# Altium PCB Jammer.PcbDoc
Units mil, origin at the board's own origin, x right, y up, seen from the top; angles counter-clockwise.
Board outline 2745 x 2485 mil, 2 copper layers (Top Layer, Bottom Layer); 20 components, 13 nets, 50 pads, 6 vias.
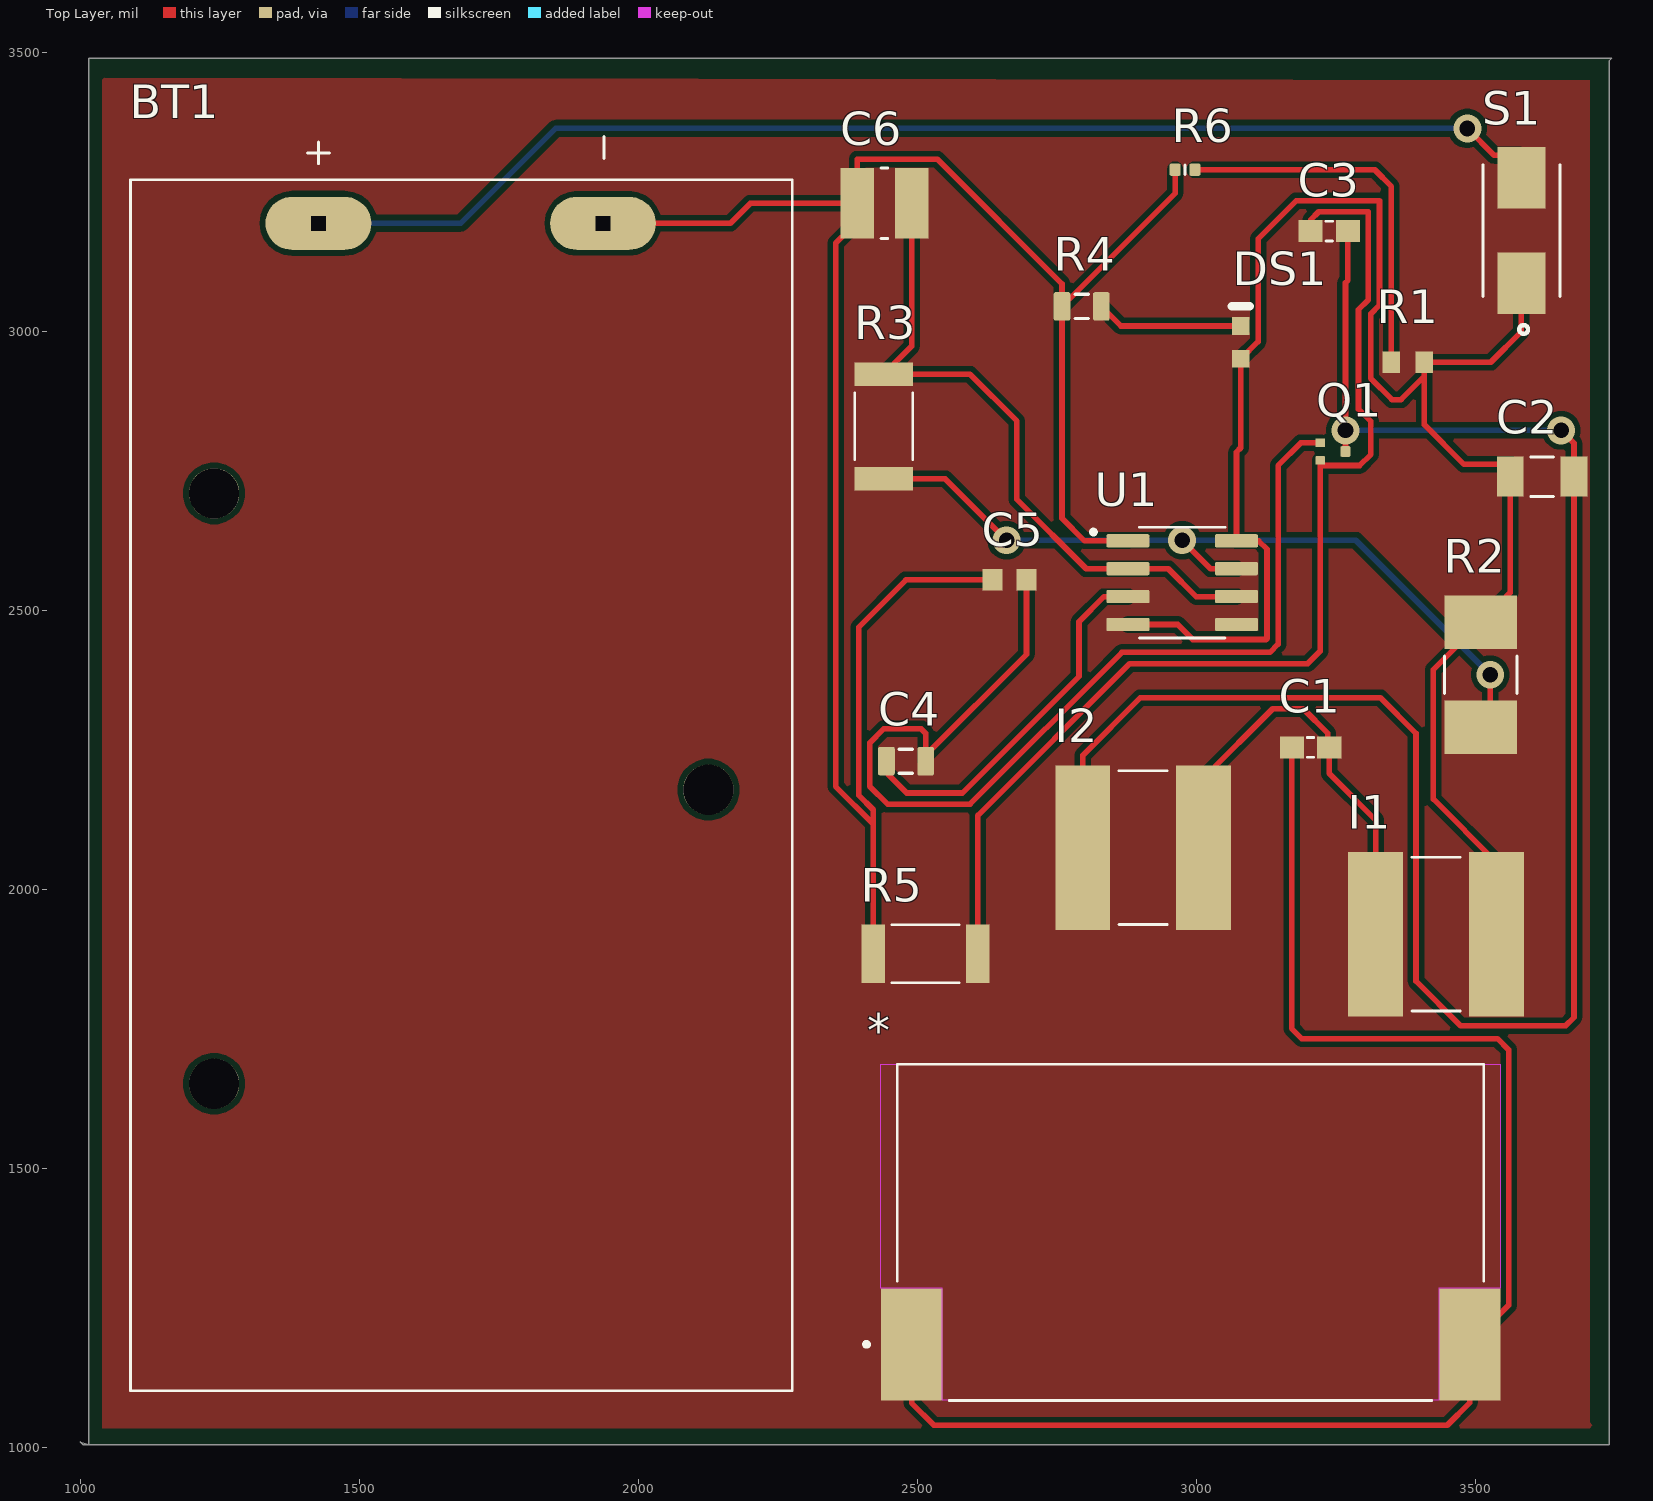
[diagram p0: Top Layer view]
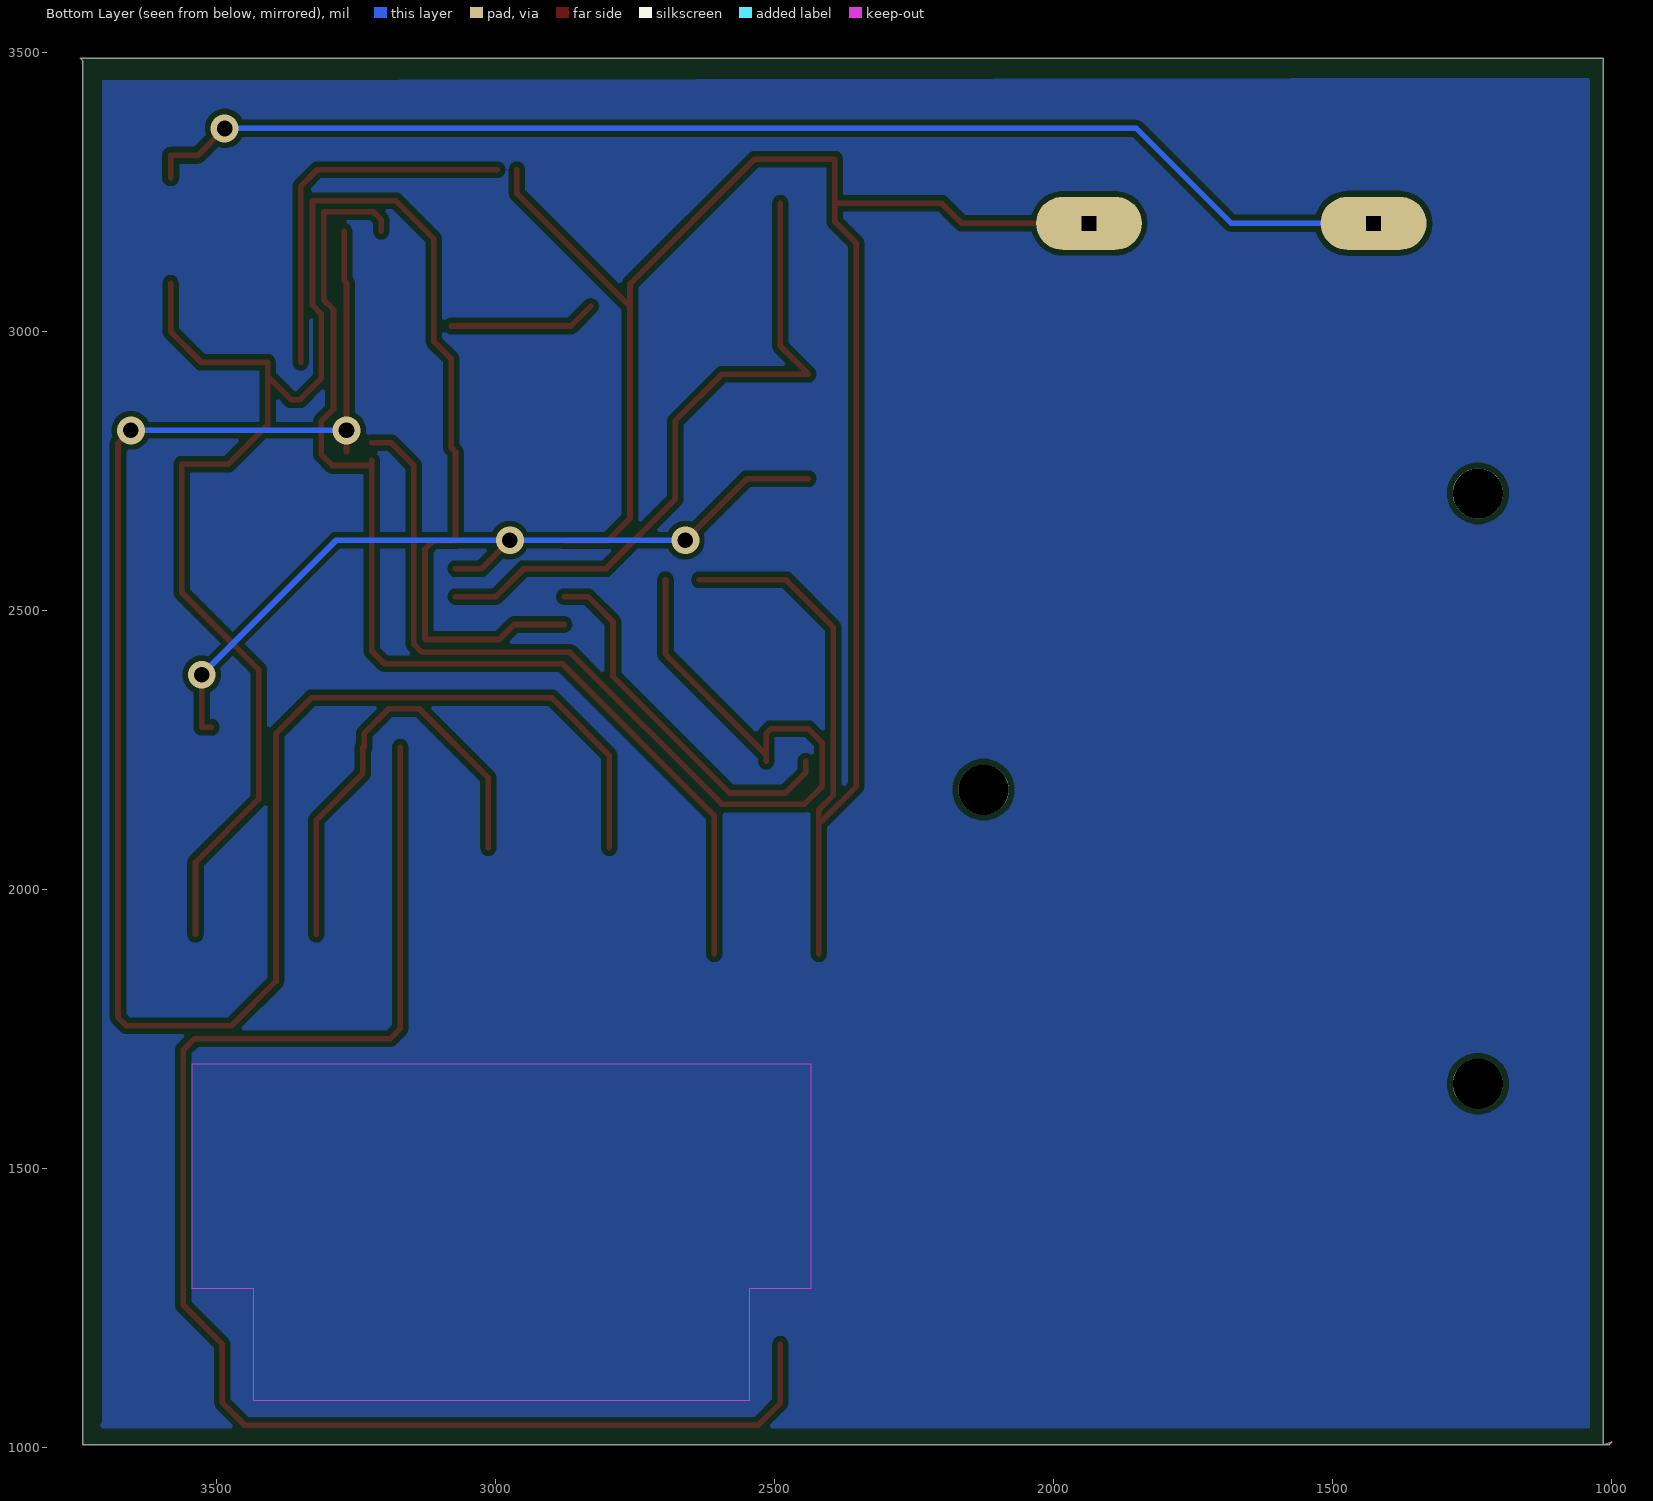
[diagram p1: Bottom Layer view, seen from below]
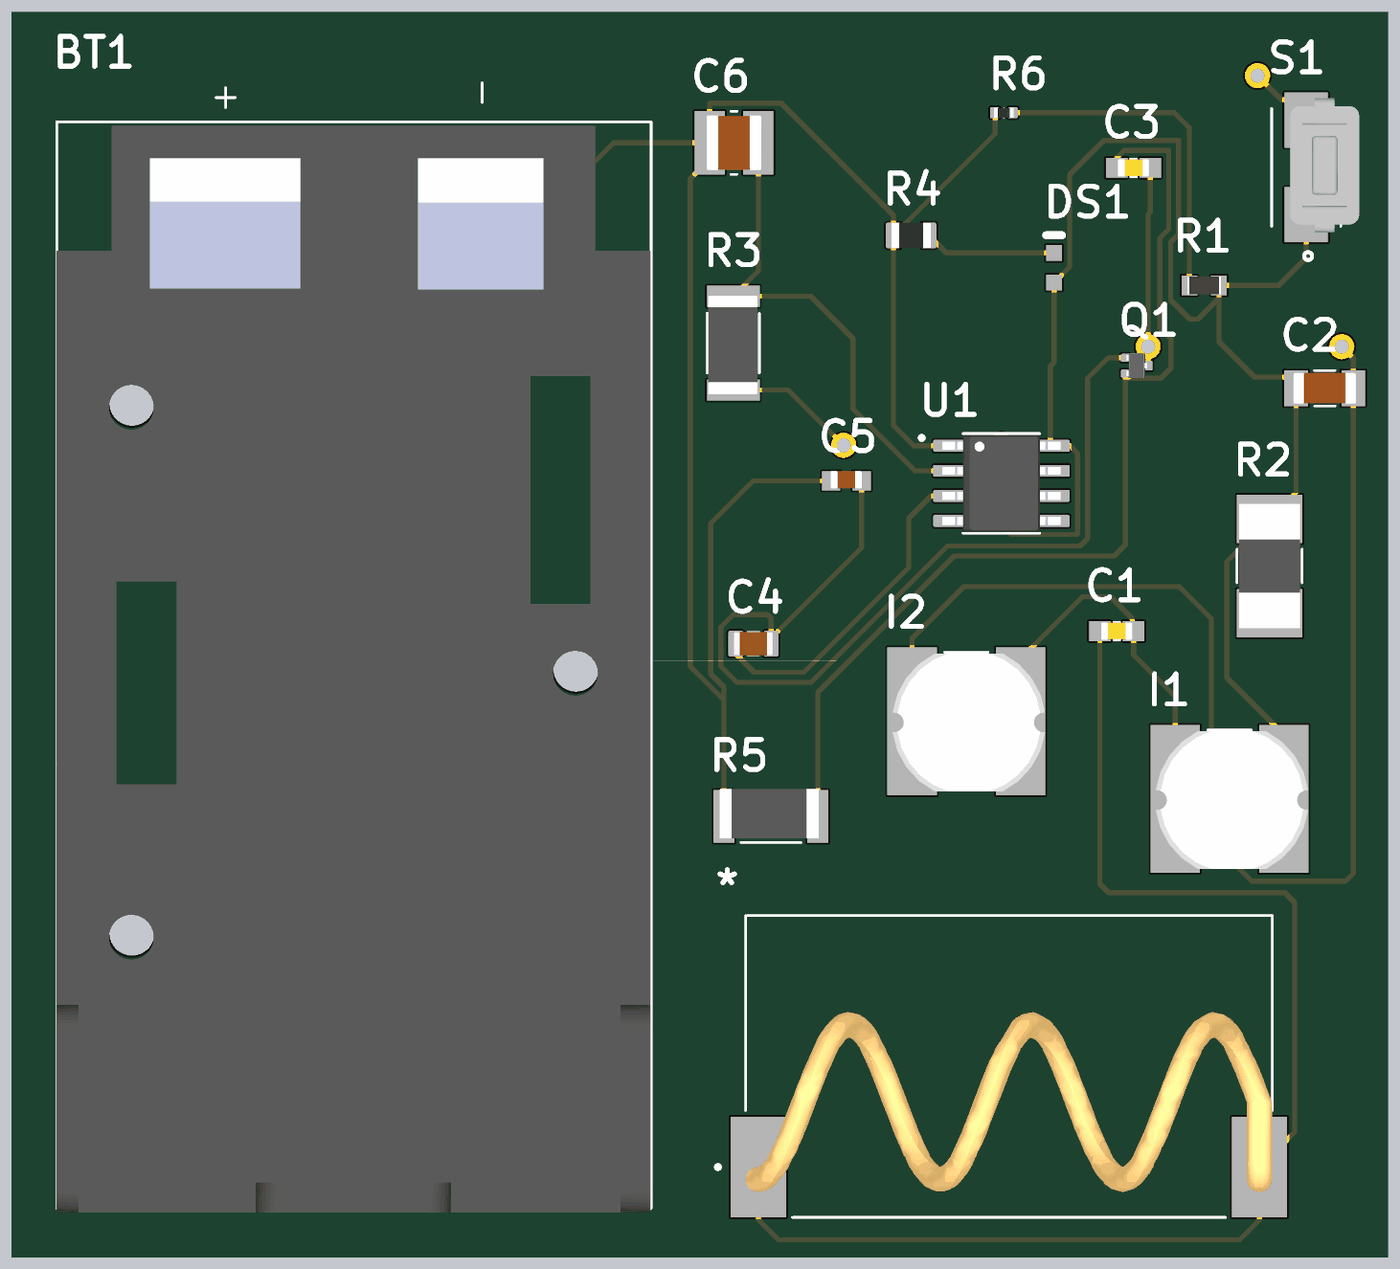
[diagram p2: 3D render of the assembled board from above, using the file's embedded part models]

## Layer stack, top to bottom
Top Solder: solder mask 0.4, Solder Resist, Dk 3.5
Top Layer: signal copper 1.4
Dielectric 1: dielectric 12.6, FR-4, Dk 4.8
Bottom Layer: signal copper 1.4
Bottom Solder: solder mask 0.4, Solder Resist, Dk 3.5

## Board outline
1015,1005 1015,3490 3745,3490 3740,3485 3740,1005 1005,1005 1000,1010

## Design rules (kind name [scope] priority, off if disabled: settings)
Clearance [All] p1: gap=10 ignorepadtopadclearanceinfootprint=FALSE except(0: Arc-Hole Track-Hole SMDPad-Hole THPad-Hole Via-Hole Fill-Hole Poly-Hole Region-Hole Text-Hole)
PolygonConnect [All] p1: connectstyle=Relief reliefconductorwidth=10 reliefentries=4 polygonreliefangle="90 Angle" airgapwidth=10
RoomDefinition Jammer [InComponentClass('Jammer')] p1: confinementstyle=ConfineIn formatcopy=TRUE lockcomponents=FALSE outline 1012,1000 3755,1000 3755,3490 1012,3490
RoutingVias [All] p1: holewidth=28 width=50 viastyle="Through Hole" minholewidth=28 minwidth=50 maxholewidth=28 maxwidth=50
SolderMaskExpansion [All] p1: expansion=4 istentingtop=FALSE
Width [All] p1: maxlimit=10 minlimit=10 preferedwidth=10
30 further rules are at their usual default settings.

## Components (designator, comment, footprint, x,y, rotation, side; value= is the part's Value field where it differs from the comment)
* "ANT" ANT 2955,1370 r0 top
BT1 "9V Battery" "9V Battery" 1712,2294 r90 top
C1 "4.7pf" "4.7pf CAP" 3200,2255 r0 top
C2 "30pf" "30pf Trimmer" 3625,2735 r0 top
C3 "2pf" "2pf CAP" 3233.46,3180 r0 top
C4 "Capacitor 4.7µF +/-40% 25V 0805" CAPC0805(2012)145_L 2480,2230 r180 top value=4.7µF
C5 "47pf" "47pf CAP" 2665.51,2555 r0 top
C6 "3.3pf" "3.3pf CAP" 2441.34,3230 r0 top
DS1 "LED" AVAG-HSMX-C190_V 3080,2980.47 r90 top
I1 "3turn 24 AWG" Inductor 3445,1935 r0 top
I2 "4turn 24AWG" Inductor 2920,2090 r0 top
Q1 "NPN" ROHM-SOT723-3_V 3245,2785 r0 top
R1 "Resistor 10k +/-1% 0603 100 mW" RESC1608X55X25ML10T15 3379.53,2945 r0 top value=10k
R2 "6.8k" "6.8K RES" 3505,2385 r90 top
R3 "82k" "82K RES" 2435,2815 r90 top
R4 "Resistor 1K +/-5% 0805 125 mW" RESC0805(2012)_L 2795,3045 r0 top value=1k
R5 "220k" "220 RES" 2510,1890 r0 top
R6 "5D6KR2J" RESC0402(1005)_L 2980,3290 r0 top value=5.6k
S1 "SW" Switch 3585,3185 r90 top
U1 "LM555" LM555 2970,2555 r0 top

## Footprints (in the part's own frame and the unit in brackets; to place one, negate y for a bottom-side part, rotate by r counter-clockwise, add the part's x,y. Pads: shape width x height; smd on the part's side, far side on the other; paste and mask are expansions set on the pad)
"2pf CAP" [mm]
  rect 1.1x1 smd: 1(-0.723,0) 2(0.977,0)
  silkscreen extent -0.02,-0.45 0.28,0.45, body extent -0.67,-0.45 0.93,0.45, height 0.79
"3.3pf CAP" [mm]
  rect 1.53x3.21 smd: 1(-1.236,0) 2(1.236,0)
  silkscreen extent -0.15,-1.6 0.15,1.6, body extent -1.4,-1.4 1.4,1.4, height 1.34
"4.7pf CAP" [mm]
  rect 1.1x1 smd: 1(-0.723,0) 2(0.977,0)
  silkscreen extent -0.02,-0.45 0.28,0.45, body extent -0.67,-0.45 0.93,0.45, height 0.79
"6.8K RES" [mm]
  rect 2.44x3.32 smd: 1(-2.39,-0.127) 2(2.39,-0.127)
  silkscreen extent -0.85,-1.78 0.85,1.52, body extent -3.15,-1.68 3.15,1.42, height 0.77
"9V Battery" [mil]
  oval 94.88x189.76 hole 26 square: N(900,-225) P(900,285)
  round 90 hole 90 unplated: ""(-642,472) ""(-115,-414) ""(416,472)
  silkscreen extent -1192,-564 1056,622, body extent -1200,-563 970,623, height 845
"30pf Trimmer" [mm]
  rect 1.21x1.82 smd: 1(-1.577,0.127) 2(1.323,0.127)
  silkscreen extent -0.65,-0.77 0.39,1.03, body extent -1.73,-0.67 1.47,0.93, height 1.3
"47pf CAP" [mm]
  rect 0.92x0.98 smd: 1(-0.775,0) 2(0.775,0)
  body extent -0.8,-0.39 0.8,0.51, height 0.81
"82K RES" [mm]
  rect 1.07x2.67 smd: 1(-1.999,-0.127) 2(2.761,-0.127)
  silkscreen extent -1.14,-1.45 1.9,1.19, body extent -2.21,-1.36 2.79,1.14, height 1.15
"220 RES" [mm]
  rect 1.07x2.67 smd: 1(-2.253,-0.127) 2(2.507,-0.127)
  silkscreen extent -1.39,-1.45 1.65,1.19, body extent -2.46,-1.23 2.54,1.27, height 1.15
ANT [mil]
  rect 110.24x200.79 smd: 1(-465,-185) 2(535,-185)
  Keep-Out Layer region: 589.92,-84.41 479.68,-84.41 479.68,-285.59 -409.68,-285.59 -409.68,-84.41 -519.92,-84.41 -519.92,316.97 589.92,316.97
  Keep-Out Layer region: 589.92,-84.41 479.68,-84.41 479.68,-285.59 -409.68,-285.59 -409.68,-84.41 -519.92,-84.41 -519.92,316.97 589.92,316.97
  silkscreen extent -550,-285 561,317, body extent -491,-235 560,125, height 630
AVAG-HSMX-C190_V [mm] "SMD, 2-Leads, Body 1.6x0.8mm, Height 0.9mm"
  rect 0.8x0.8 smd: 1(-0.75,0) 2(0.75,0)
  silkscreen extent 1.65,-0.4 1.65,0.4, body extent -0.8,-0.4 0.8,0.4, height 0.9
CAPC0805(2012)145_L [mm] "Chip Capacitor, Body 2.0x1.2mm, Height 1.45mm, IPC High Density"
  rrect25% 0.76x1.3 smd: 1(-0.9,0) 2(0.89,0)
  silkscreen extent -0.3,-0.55 0.3,0.55, body extent -1,-0.6 1,0.6, height 1.45
Inductor [mm]
  rect 2.5x7.5 smd: 1(-3.131,-0.381) 2(2.369,-0.381)
  silkscreen extent -1.48,-3.88 0.72,3.12, body extent -4.12,-3.94 3.61,3.06, height 4.91
LM555 [mm]
  rrect25% 1.97x0.6 smd: 1(-2.343,1.778) 2(-2.343,0.508) 3(-2.343,-0.762) 4(-2.343,-2.032) 5(2.597,-2.032) 6(2.597,-0.762) 7(2.597,0.508) 8(2.597,1.778)
  silkscreen extent -4.01,-2.65 2.08,2.4, body extent -2.87,-2.58 3.12,2.32, height 1.71
RESC0402(1005)_L [mm] "Chip Resistor, Body 1.0x0.5mm, IPC High Density"
  rrect25% 0.5x0.55 smd: 1(-0.45,0) 2(0.45,0)
  silkscreen extent 0,-0.2 0,0.2, body extent -0.5,-0.25 0.5,0.25, height 0.3
RESC0805(2012)_L [mm] "Chip Resistor, Body 2.0x1.3mm, IPC High Density"
  rrect25% 0.76x1.3 smd: 1(-0.9,0) 2(0.89,0)
  silkscreen extent -0.3,-0.55 0.3,0.55, body extent -1,-0.62 1,0.63, height 0.6
RESC1608X55X25ML10T15 [mm] "Chip Resistor, 2-Leads, Body 1.70x0.90mm, IPC Low Density"
  rect 0.8x1 smd: 1(-0.75,0) 2(0.75,0)
  body extent -0.85,-0.45 0.85,0.45, height 0.55
ROHM-SOT723-3_V [mm] "SOT723, 3-Leads, Body 1.2x0.8mm, Pitch 0.8mm"
  rrect30% 0.45x0.4 smd: 1(-0.575,0.4) 2(-0.575,-0.4)
  rrect30% 0.45x0.5 smd: 3(0.575,0)
  body extent -0.53,-0.63 0.53,0.63, height 0.45
Switch [mm]
  rect 2.8x2.2 smd: 1(-2.504,0.051) 2(2.296,0.051)
  silkscreen extent -4.8,-1.7 2.9,1.8, body extent -3.4,-2.64 3.4,0.86, height 4.27

## Part data
C1: library part "4.7pf CAP"
C2: library part "30pf Trimmer"
C3: library part "2pf CAP"
C4: library part CMP-001-00080-4, "Chip Capacitor, 4.7µF +/-40%, 25V, 0805, Thickness 1.45 mm", Case/Package=0805, Max Operating Temperature=85°C, Min Operating Temperature=-55°C, Tolerance=20%, Voltage Rating=25V, Mounting Technology=SMT, Pins=2
C5: library part "47pf CAP"
C6: library part "3.3pf CAP"
DS1: library part CMP-007-00014-2, "LED Uni-Color Red, 65 mW, 20 mA, -40 to 85 degC, 2-Pin SMD, RoHS, Tape and Reel", Case/Package=0603, Colour=Red, Forward Current=20mA, Forward Voltage=1.8V, Manufacturer=Avago, Max Operating Temperature=85°C, Min Operating Temperature=-40°C, Package Description="2-Pin Surface Mount Device, Body 1.6 x 0.8 mm, Height 0.9 mm", Package Quantity=4000, Package Reference=HSMX-C190, Power=78mW, Datasheet URL=http://docs.avagotech.com/docs/AV02-0551EN, Datasheet Version=Mar-12, Illumination Colour=Red, Lens Style=Diffused, Luminous Intensity=17mcd, Manufacturer URL=http://www.avagotech.com/, Mounting Technology=SM, Nominal Vf=1.8V, Packaging=TapeandReel, Pins=2, RoHS Compliant=True, Viewing Angle=170degrees
I1 I2: library part Inductor
Q1: library part CMP-013-00028-2, "NPN General Purpose Transistor, 3-Pin SOT-723, Pb-Free, Tape and Reel", Case/Package=SOT-723, ComponentLink1Description="Manufacturer URL", ComponentLink1URL=http://www.onsemi.com/, ComponentLink2Description=Datasheet, ComponentLink2URL=http://www.onsemi.cn/pub_link/Collateral/MMBT2222AM3-D.PDF, ComponentLink3Description="Package Specification", ComponentLink3URL=http://www.onsemi.com/pub_link/Collateral/631AA.PDF, Mounting Technology=SMT, Pins=3, RoHS Compliant=TRUE
R1: library part CMP-009-00017-5, "Chip Resistor, 10 KOhm, +/- 1%, 01 W, -55 to 155 degC, 0603 (1608 Metric)", Case/Package=0603, Max Operating Temperature=155°C, Min Operating Temperature=-55°C, Power=100mW, Tolerance=1%, Voltage Rating=50V, Mounting Technology=SM, Pins=2, RoHS Compliant=True
R2: library part "6.8K RES"
R3: library part "82K RES"
R4: library part CMP-009-00118-3, "Chip Resistor, 1 kOhms, +/-5%, 125 mW, -55 to 155 degC, 0805", Case/Package=0805, Max Operating Temperature=155°C, Min Operating Temperature=-55°C, Power=125mW, Tolerance=5%, Pins=2
R5: library part "220 RES"
R6: library part CMP-009-00108-2, "5K6 0.063W 5% 0402 (1005 Metric)  SMD", Case/Package=0402, Power=63mW, Tolerance=5%, Mounting Technology=SMT, Pins=2
S1: library part Switch

## Via types
v1: diameter 50, hole 28, Top Layer to Bottom Layer, 6 vias

## Nets (pads, with @x,y where several pads share a name; then routed paths per layer and width w, separated by ;. In a path a pad name is that pad's centre, name@x,y a point inside that pad or via, vN(x,y) a via of type N, cw(c..) or ccw(c..) an arc to the next point about the centre after c; other vN are vias at no path point)
GND: BT1.N C5.1 C6.1 R4.1 R5.1 R6.1 U1.1 | length 3920.3
  Top Layer w10: BT1.N 2165,3194 2201,3230 C6.1 ; R5.1 2421.3,2117.7 ; C5.1 2480,2555 2395,2470 2395,2169.35 2421.3,2143.05 2421.3,2117.7 ; U1.1 2800,2625 2759.57,2665.43 R4.1 ; R6.1 2962.28,3247.72 R4.1 ; C6.1 2392.68,3197 2354,3158.32 2354,2185 2421.3,2117.7 ; C6.1 2392.68,3309 2536,3309 2759.57,3085.43 R4.1
Net*_1: *.1 *.2 C1.1 | length 2709.4
  Top Layer w10: *.1 2490,1080 2530,1040 3450,1040 3490,1080 *.2 3560,1255 3560,1713 3540,1733 3189,1733 3171,1751 3171,2255 C1.1
NetBT1_P: BT1.P S1.2 | length 2286.9
  Top Layer w10: v1(3486,3364) 3534,3316 3582.98,3316 S1.2
  Bottom Layer w10: BT1.P 1682,3194 1852,3364 v1(3486,3364)
NetC1_2: C1.2 I1.1 I2.2 | length 814.3
  Top Layer w10: I2.2 3013.27,2200 3137.27,2324 3192,2324 3236,2280 3236,2255 C1.2 3238.46,2208 3321.73,2124.73 I1.1
NetC2_1: C2.1 DS1.1 I1.2 R1.2 R2.2 S1.1 U1.4 U1.8 | length 3264.1
  Top Layer w10: U1.4 2967,2475 2993.84,2448.16 3125.16,2448.16 3127,2450 3127,2610 3112,2625 U1.8 3072.24,2784 3080,2791.76 DS1.1 3111,2981.94 3111,3166 3179.69,3234.69 3328.58,3234.69 3328.58,3047.47 3312.87,3031.76 3312.87,2916.13 3351,2878 3367.06,2878 3409.06,2920 ; I1.2 3538.27,2048.73 3425,2162 3425,2394.09 R2.2 3562.91,2532.01 C2.1 3562.91,2762 3480,2762 3409.06,2832.94 3409.06,2920 ; S1.1 3582.98,3000 3527.98,2945 R1.2 3409.06,2920
NetC2_2: C2.2 C3.2 I2.1 Q1.3 | length 3443.3
  Top Layer w10: I2.1 2796.73,2240.59 2900.15,2344 3330,2344 3394,2280 3394,1836 3474,1756 3662,1756 3677.09,1771.09 C2.2 3677.09,2799.91 v1(3654,2823) ; Q1.3 v1(3267.64,2823) 3267.64,3087.47 3271.93,3091.76 C3.2
  Bottom Layer w10: v1(3267.64,2823) v1(3654,2823)
NetC3_1: C3.1 Q1.2 R5.2 | length 2005
  Top Layer w10: R5.2 2608.7,2132.7 2881,2405 3200,2405 3222.36,2427.36 3222.36,2760 ; C3.1 3205,3200 3219.69,3214.69 3308.58,3214.69 3308.58,3057 3291,3039.42 3291,2861 3313,2839 3313,2780 3293,2760 3222.36,2760 ; Q1.2 3222.36,2760
NetC4_1: C4.1 C5.2 Q1.1 | length 1907.3
  Top Layer w10: C4.1 C4.1@2515.43,2241 ; C5.2 2696.02,2421.59 C4.1@2515.43,2241 ; Q1.1 3187.75,2800.75 3147,2760 3147,2440 3132,2425 2867,2425 2595,2153 2447,2153 2415,2185 2415,2263 2440,2288 2507.43,2288 2515.43,2280 C4.1@2515.43,2241
NetC4_2: C4.2 U1.3 | length 671.7
  Top Layer w10: C4.2 2444.96,2209.35 2481.31,2173 2581,2173 2790,2382 2790,2480 2835,2525 U1.3
NetC6_2: C6.2 R3.2 U1.2 U1.6 | length 1206.4
  Top Layer w10: C6.2 2490,2973.7 R3.2 2594.3,2923.7 2678.65,2839.35 2678.65,2699.35 2803,2575 U1.2 2950,2575 3000,2525 U1.6
NetDS1_2: DS1.2 R4.2 | length 264.5
  Top Layer w10: R4.2 2865.04,3010 DS1.2
NetR1_1: R1.1 R6.2 | length 679.7
  Top Layer w10: R6.2 3320,3290 3350,3260 R1.1
NetR2_1: R2.1 R3.1 U1.7 | length 1462
  Top Layer w10: R3.1 2550,2736.3 v1(2660.3,2626) ; v1(2975,2626) 3026,2575 U1.7 ; R2.1 3527,2290.91 v1(3527,2385)
  Bottom Layer w10: v1(2660.3,2626) v1(2975,2626) 3286,2626 v1(3527,2385)
pads on no net: BT1. U1.5

## Polygon pours and split planes (outlines as drawn)
no net on Multi-Layer (solid): 1040,3455 1040,1035 3705,1035 3710,1040 3705,1045 3705,3450